# Altium PCB PCB.PcbDoc
Units mm, origin at the board's own origin, x right, y up, seen from the top; angles counter-clockwise.
Board outline 74.04 x 66.93 mm, 2 copper layers (Top Layer, Bottom Layer); 25 components, 24 nets, 134 pads, 4 vias.
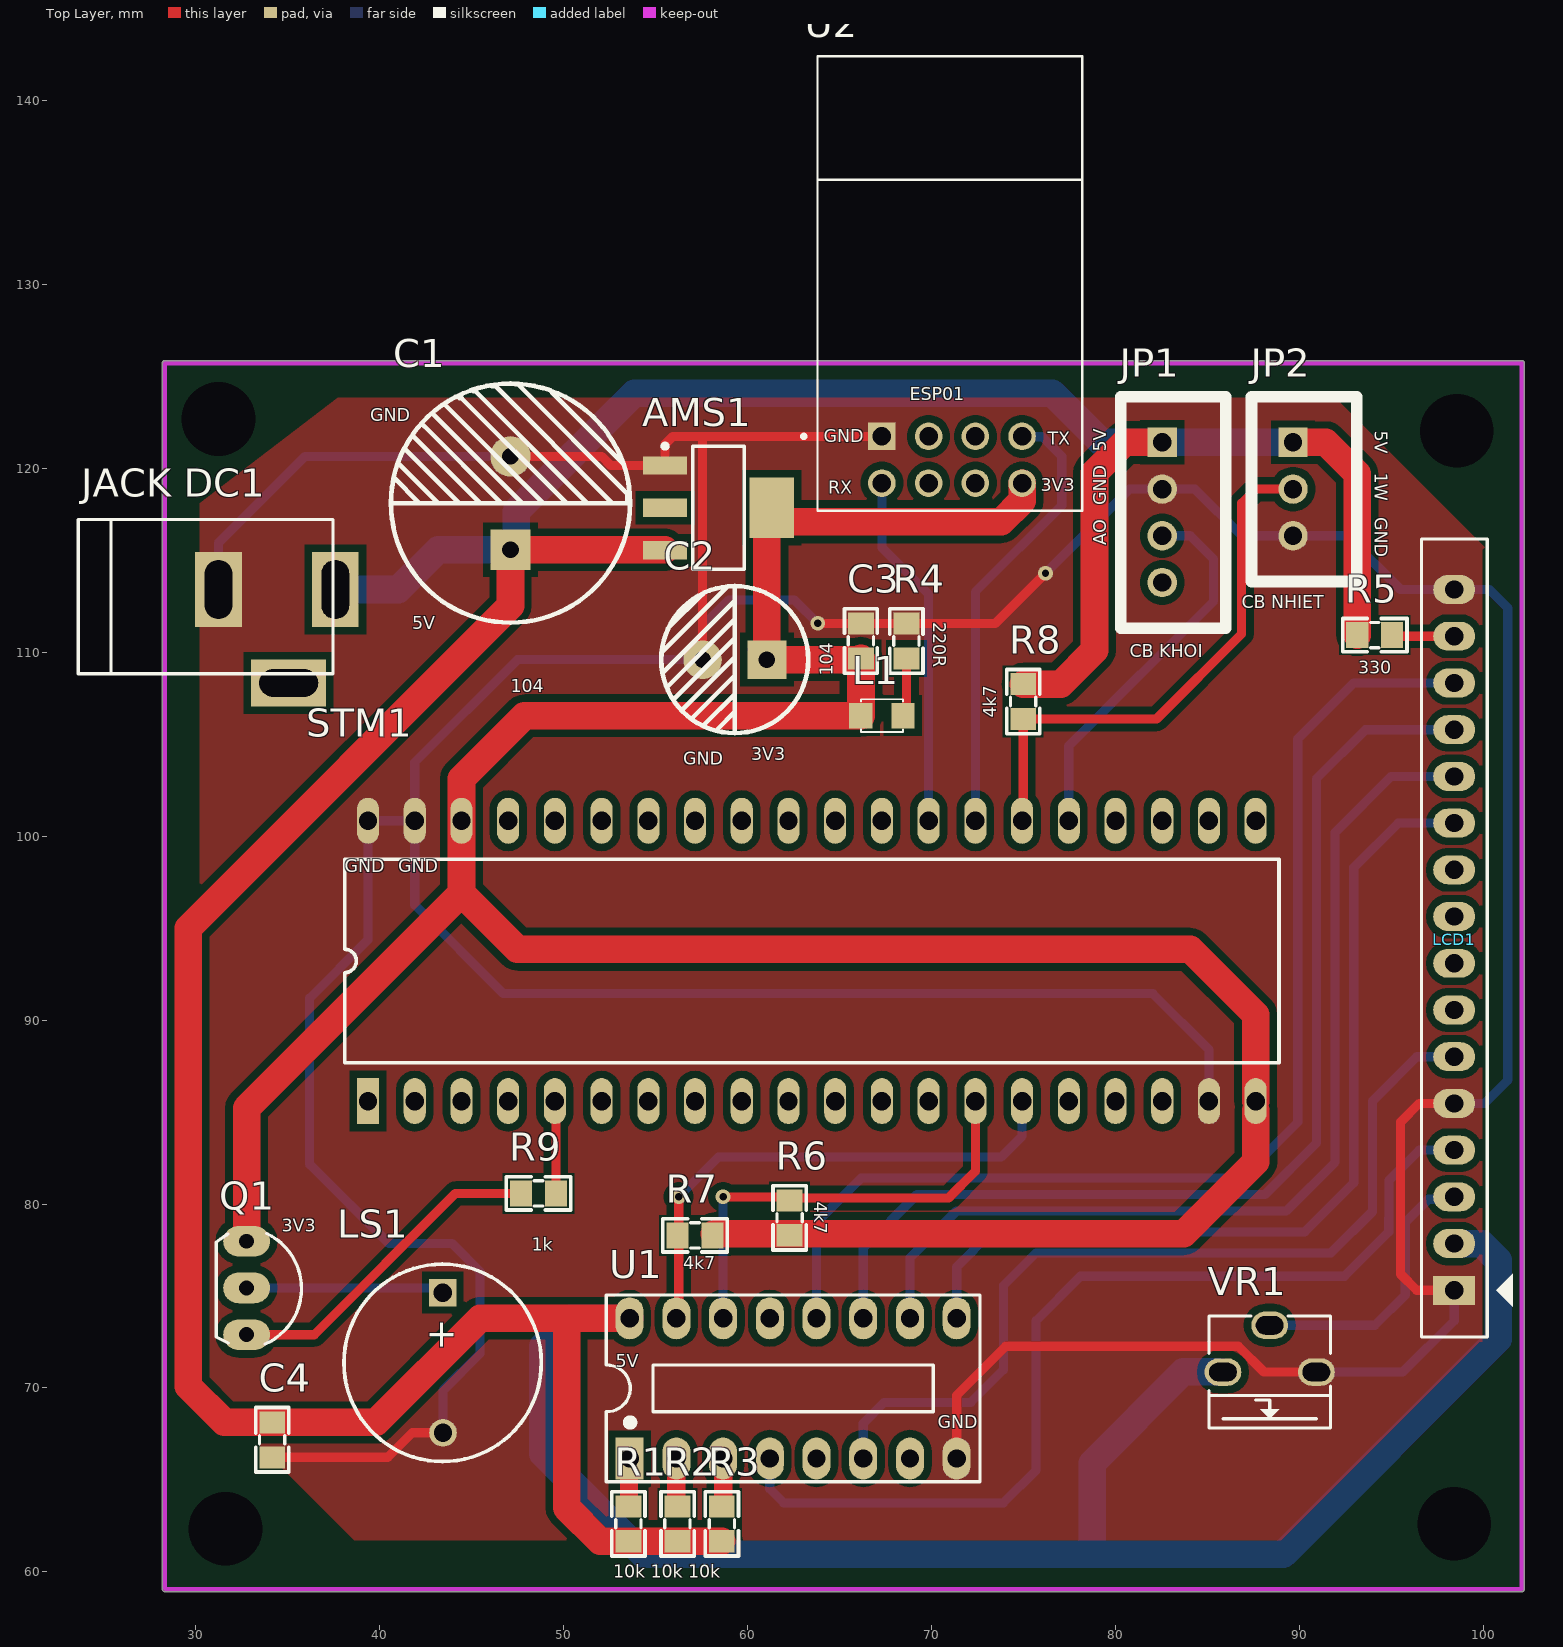
[diagram p0: Top Layer view]
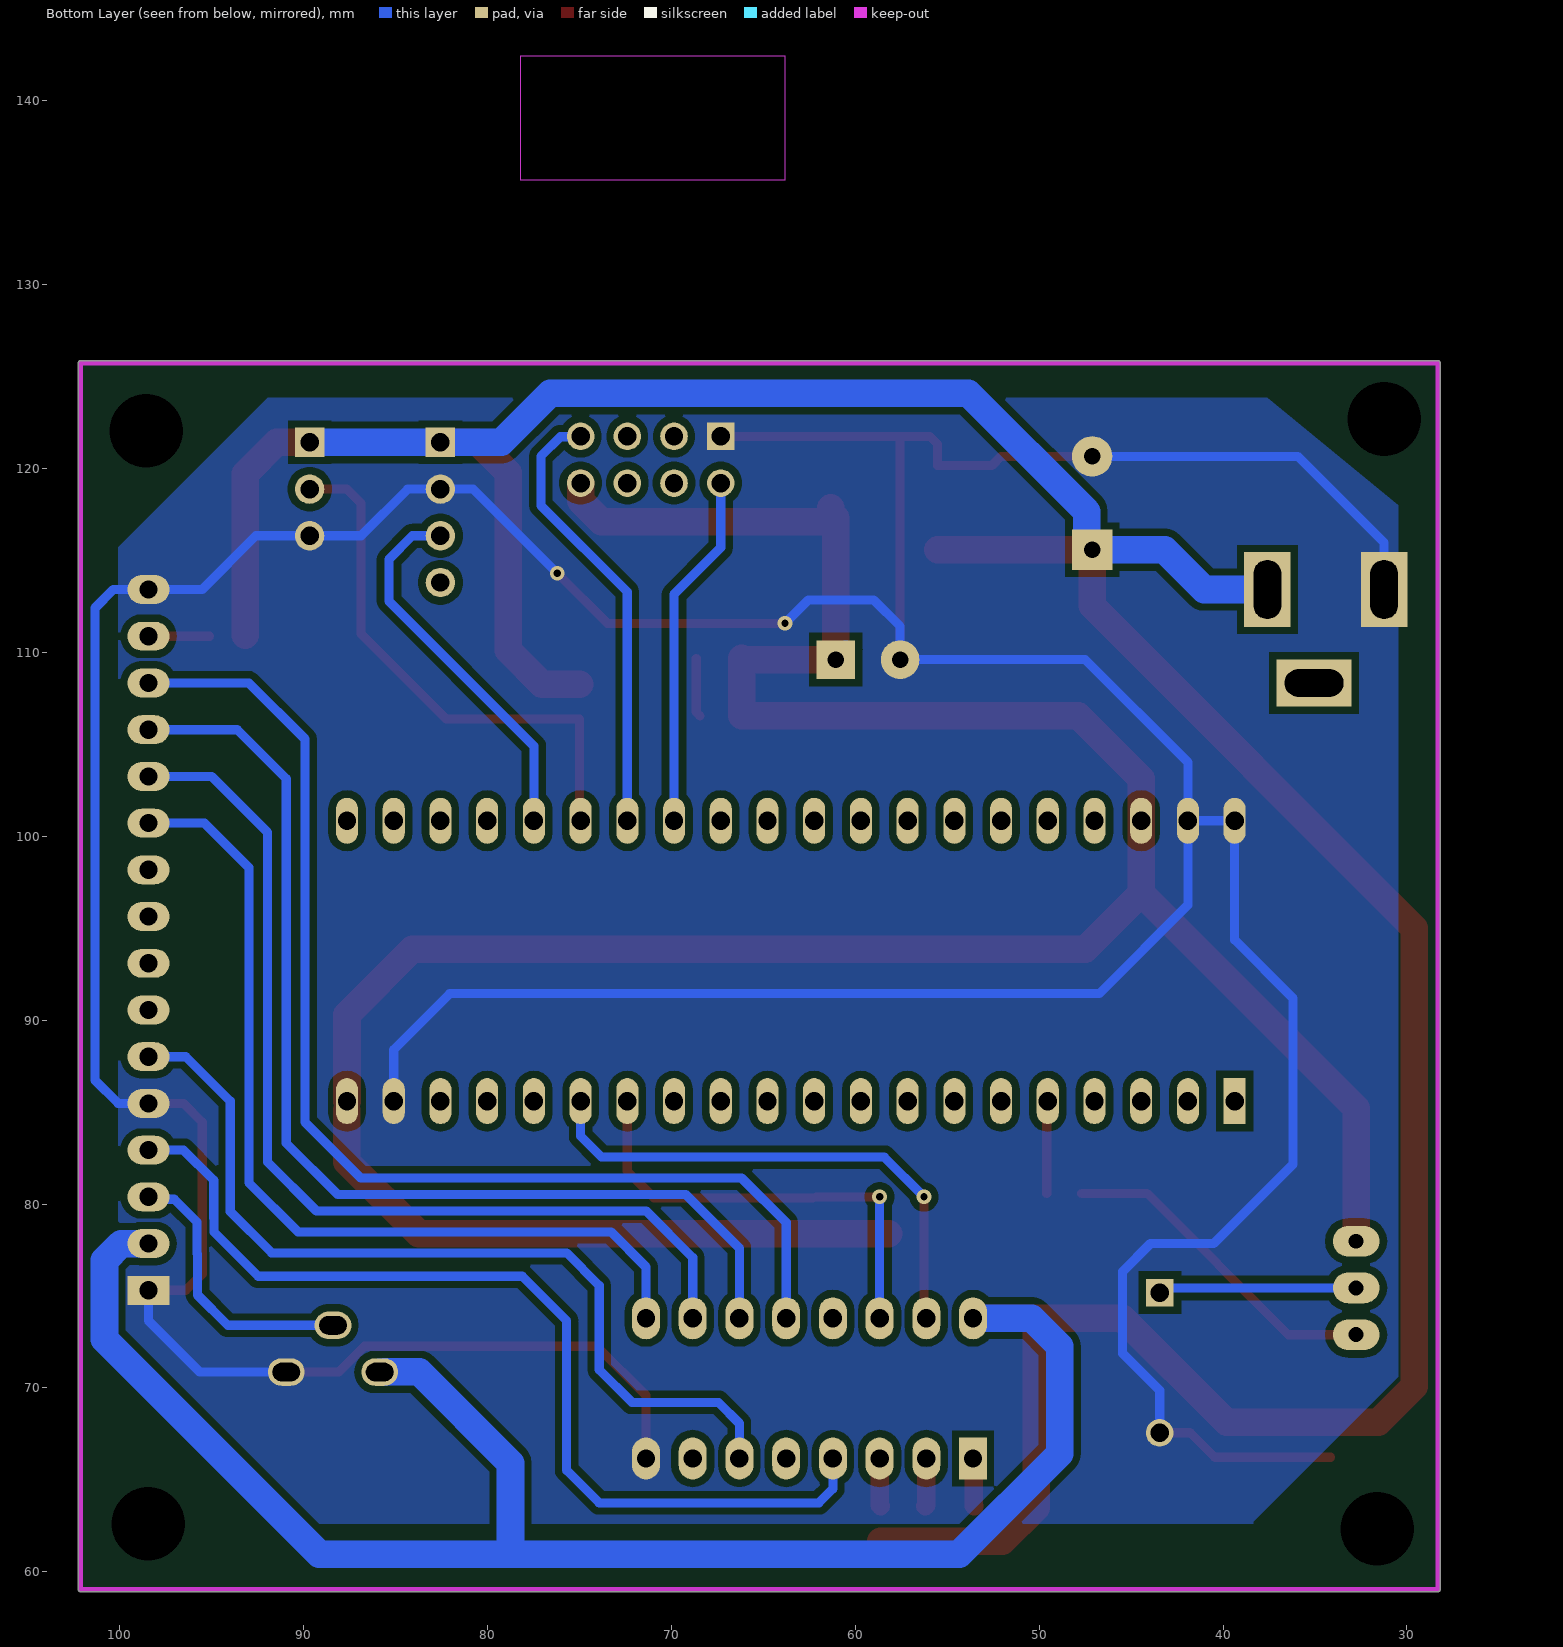
[diagram p1: Bottom Layer view, seen from below]

## Layer stack, top to bottom
Top Solder: solder mask 0.0102, Solder Resist, Dk 3.5
Top Layer: signal copper 0.0356
Dielectric 1: dielectric 0.32, FR-4, Dk 4.8
Bottom Layer: signal copper 0.0356
Bottom Solder: solder mask 0.0102, Solder Resist, Dk 3.5

## Board outline
28.321,58.928 cw(c28.321,59.055) 28.194,59.055 28.194,125.73 cw(c28.321,125.73) 28.321,125.857 102.108,125.857 cw(c102.108,125.73) 102.235,125.73 102.235,59.055 cw(c102.108,59.055) 102.108,58.928

## Design rules (kind name [scope] priority, off if disabled: settings)
Clearance Clearance_1 [InNamedPolygon('NONET_L01_P000')] p1: gap=0.4 ignorepadtopadclearanceinfootprint=FALSE
Clearance [All] p2: gap=0.4 ignorepadtopadclearanceinfootprint=FALSE
PlaneConnect [All] p1: planeconnectstyle=Direct reliefexpansion=0.508 reliefentries=4 reliefconductorwidth=0.254 reliefairgap=0.254
PolygonConnect [All] p1: connectstyle=Direct reliefconductorwidth=0.254 reliefentries=4 polygonreliefangle="90 Angle" airgapwidth=0.254
RoutingVias [All] p1: holewidth=0.4 width=0.8 viastyle="Through Hole" minholewidth=0.4 minwidth=0.8 maxholewidth=0.4 maxwidth=0.8
SolderMaskExpansion [All] p1: expansion=0.102 istentingtop=FALSE
Width [All] p1: maxlimit=1.5 minlimit=0.5 preferedwidth=1
29 further rules are at their usual default settings.

## Components (designator, comment, footprint, x,y, rotation, side; value= is the part's Value field where it differs from the comment)
AMS1 "AMS1117-3.3V" SOT223 58.42,117.856 r270 top value="AMS1117-3.3V SOT223"
C1 "680uF" "tu hoa 13mm" 47.117,118.11 r90 top
C2 "470uF" "tu hoa 8mm" 59.309,109.601 r180 top
C3 "104" "tu 0805" 66.167,110.617 r90 top
C4 "104" "tu 0805" 34.163,67.183 r270 top
"JACK DC1" "JACK DC 5.5" "JACK DC 5.5" 34.417,110.871 r0 top value="Jac DC"
JP1 "Header 4P 2.54 Duc Thang" XH2.54M-4 82.55,121.412 r270 top
JP2 "Header 3P 2.54 Duc Thang" XH2.54M-3 89.662,121.412 r270 top
L1 "LED 0805" LED-0805-Red 66.167,106.553 r0 top
LCD1 "LCD1602 XL" "LCD1602 with Jump" 98.425,75.311 r90 top
LS1 "Coi Chip Speaker" "Coi Chip Speacker" 43.434,75.184 r270 top
Q1 "A1015" QTO-92 32.766,75.438 r270 top
R1 "10k" "tro smd 0805" 53.467,62.611 r90 top
R2 "10k" "tro smd 0805" 56.134,62.611 r90 top
R3 "10k" "tro smd 0805" 58.547,62.611 r90 top
R4 "220R" "tro smd 0805" 68.707,110.617 r270 top
R5 "330R" "Tro SMD 0805" 94.107,110.871 r180 top
R6 "4.7k" "tro smd 0805" 62.23,79.248 r90 top
R7 "4.7k" "tro smd 0805" 57.15,78.232 r180 top
R8 "4.7k" "tro smd 0805" 74.93,107.315 r90 top
R9 "1k" "tro smd 0805" 48.641,80.518 r180 top
STM1 "KIT STM32F103C8T6" "STM32F103 KIT" 39.37,85.598 r90 top
U1 "PCF8574" DIP16 53.594,66.167 r0 top
U2 "ESP8266-01/ESP-01" XCVR_ESP8266-01/ESP-01 71.12,130.048 r0 top
VR1 "10K" "Bien Tro Tam Giac Nam" 85.852,70.866 r270 top

## Footprints (in the part's own frame and the unit in brackets; to place one, negate y for a bottom-side part, rotate by r counter-clockwise, add the part's x,y. Pads: shape width x height; smd on the part's side, far side on the other; paste and mask are expansions set on the pad)
"Bien Tro Tam Giac Nam" [mm] "RM063"
  oval 1.5x2 hole 1 slot 1.5 at 90 deg: F(-2.54,2.54) F(0,5.08) F(0,0)
  silkscreen extent -3.05,-0.76 3.05,5.84, body extent -2.68,-0.71 2.95,5.79, height 9.5
"Coi Chip Speacker" [mm]
  rect 1.5x1.5 hole 1: F(0,0)
  round 1.5 hole 1: F(7.62,0.013)
  silkscreen extent -1.55,-5.38 9.18,5.36, body extent -2.22,-6 13.24,6, height 4.5
DIP16 [mil] "16 PIN, W 300mil, Pin to pin 100mil"
  rect 60x90 hole 39.37: F(0,0)
  oval 60x90 hole 39.37: F(0,300) F(100,0) F(100,300) F(200,0) F(200,300) F(300,0) F(300,300) F(400,0) F(400,300) F(500,0) F(500,300) F(600,0) F(600,300) F(700,0) F(700,300)
  silkscreen extent -50,-50 750,350, body extent -52,-57 752,356, height 299
"JACK DC 5.5" [mm] "Jac DC input"
  rect 2.54x4.064 hole 1.5 slot 3.2 at 90 deg: F(-3.175,2.54) F(3.175,2.54)
  rect 4.064x2.54 hole 1.5 slot 3.2 at 0 deg: F(0.635,-2.54)
  silkscreen extent -10.79,-2.03 3.05,6.35, body extent -10.42,-2.67 3.4,6.84, height 11.02
"LCD1602 with Jump" [mil] "LCD dipslay 16x2, 16 pin"
  rect 62x90 hole 39: F(0,0)
  oval 62x90 hole 39: F(100,0) F(200,0) F(300,0) F(400,0) F(500,0) F(600,0) F(700,0) F(800,0) F(900,0) F(1000,0) F(1100,0) F(1200,0) F(1300,0) F(1400,0) F(1500,0)
  silkscreen extent -100,-125 1608,70, body extent -320,-1353 2850,84, height 764
LED-0805-Red [mil]
  rect 50x55 smd: F(0,0) F(90,0)
  silkscreen extent 0,-35 90,35, body extent 5,-25 85,25, height 43
QTO-92 [mil] "TO-92"
  oval 66x100 hole 32: F(-100,0) F(0,0) F(100,0)
  silkscreen extent -117,-65 120,118, body extent -109,-66 109,95, height 245
SOT223 [mm]
  rect 1x2.4 smd: F(-2.3,-2.9) F(0,-2.9) F(2.3,-2.9)
  rect 3.3x2.4 smd: F(0,2.9)
  silkscreen extent -3.47,-3.02 3.35,1.4, body extent -3.25,-3.56 3.25,3.4, height 1.68
"STM32F103 KIT" [mm]
  rect 2.5x1.2 hole 1: F(0,0)
  oval 2.5x1.2 hole 1: F(0,-2.54) F(0,-5.08) F(0,-7.62) F(0,-10.16) F(0,-12.7) F(0,-15.24) F(0,-17.78) F(0,-20.32) F(0,-22.86) F(0,-25.4) F(0,-27.94) F(0,-30.48) F(0,-33.02) F(0,-35.56) F(0,-38.1) F(0,-40.64) F(0,-43.18) F(0,-45.72) F(0,-48.26) F(15.24,-22.86) F(15.24,-20.32) F(15.24,-17.78) F(15.24,-15.24) F(15.24,-12.7) F(15.24,-10.16) F(15.24,-7.62) F(15.24,-5.08) F(15.24,-2.54) F(15.24,0) F(15.24,-48.26) F(15.24,-45.72) F(15.24,-43.18) F(15.24,-40.64) F(15.24,-38.1) F(15.24,-35.56) F(15.24,-33.02) F(15.24,-30.48) F(15.24,-27.94) F(15.24,-25.4)
  silkscreen extent 2.08,-49.53 13.16,1.27, body extent -3.81,-53.97 19.05,3.59, height 16.12
"tro smd 0805" [mm]
  rect 1.2x1.4 smd: F(-0.946,-0.061) F(0.954,-0.061)
  silkscreen extent -1.75,-0.97 1.75,0.84, body extent -1.56,-0.76 1.44,0.64, height 0.53
"Tro SMD 0805" [mm]
  rect 1.2x1.4 smd: F(-0.946,-0.061) F(0.954,-0.061)
  silkscreen extent -1.75,-0.97 1.75,0.84, body extent -1.56,-0.76 1.44,0.64, height 0.53
"tu 0805" [mm] "Compoment SMD 80x50mil"
  rect 1.2x1.4 smd: F(-0.946,-0.003) F(0.954,-0.003)
  silkscreen extent -1.75,-0.89 1.75,0.89, body extent -1.01,-0.64 1.01,0.63, height 0.61
"tu hoa 8mm" [mm]
  rect 2.1x2.1 hole 0.9: F(-1.75,0)
  round 2.1 hole 0.9: F(1.75,0)
  silkscreen extent -4,-4 4,4, body extent -4.1,-4.07 4.1,4.13, height 13.81
"tu hoa 13mm" [mm]
  rect 2.2x2.2 hole 0.9: F(-2.54,0)
  round 2.2 hole 0.9: F(2.54,0)
  silkscreen extent -6.5,-6.5 6.5,6.5, body extent -6.25,-6.25 6.26,6.25, height 23.02
XCVR_ESP8266-01/ESP-01 [mm]
  round 1.5 hole 1: F(-3.81,-10.85) F(-1.27,-10.85) F(-1.27,-8.31) F(1.27,-10.85) F(1.27,-8.31) F(3.81,-10.85) F(3.81,-8.31)
  rect 1.5x1.5 hole 1: F(-3.81,-8.31)
  Keep-Out Layer region: 7.09,5.65 -7.31,5.65 -7.31,12.35 7.09,12.35
  silkscreen extent -8.16,-12.35 7.09,12.35
XH2.54M-3 [mm]
  rect 1.6x1.6 hole 1: F(0,0)
  round 1.6 hole 1: F(2.54,0) F(5.08,0)
  silkscreen extent -2.48,-2.26 7.56,3.46, body extent -2.48,-2.26 7.56,3.48, height 6.91
XH2.54M-4 [mm]
  rect 1.6x1.6 hole 1: F(0,0)
  round 1.6 hole 1: F(2.54,0) F(5.08,0) F(7.62,0)
  silkscreen extent -2.48,-2.26 10.1,3.46, body extent -2.48,-2.26 10.1,3.48, height 6.91

## Part data
AMS1: library part "AMS1117 SMD", "Dán", Chung_Loai=Dán, Don_Vi=Con, Ma_Hang=MH000596
C1: library part "Tu Hoa 680uF 25V 13x17", "Cắm", Chung_Loai=Cắm, Don_Vi=Con, Ma_Hang=MH005082, So_Chan=2, Ten_Linh_Kien="Tụ Hóa 680uF 25V"
C2: library part "Tu Hoa 470uF 6.3V 8x11", "Cắm", Chung_Loai=Cắm, Don_Vi=Con, Ma_Hang=MH004511, So_Chan=2, Ten_Linh_Kien="Tụ Hóa 470uF 6.3V 8x11MM"
C3 C4: library part "Tu 0805 104 50V 10%", "Dán", Chung_Loai=Dán, Don_Vi=Con, Ma_Hang=MH004551, So_Chan=2, Ten_Linh_Kien="Tụ 0805 104-100nF 10% 50V"
JP1 JP2: "Cắm", Chung_Loai=Cắm, Don_Vi=Con
  JP1: Ma_Hang=MH001285, Ten_Linh_Kien="Header 4P XH2.54-4P Đực Thẳng"
  JP2: Ma_Hang=MH001292, Ten_Linh_Kien="Header 3P XH2.54-3P Đực Thẳng"
L1: library part "LED 0805 Do", "Dán", Chung_Loai=Dán, Don_Vi=Con, Ma_Hang=MH000897, Ten_Linh_Kien="LED 0805 Màu Đỏ (Red)"
LCD1: "LCD 1602 Xanh Lá", CHIP=HD44780, Ma_Hang=67HZ, NCC=NSHOP, Ten="Màn hình LCD 1602 Xanh Lá"
LS1: "Còi chip"
Q1: "PNP 600mW, ECB"
R1 R2 R3: library part "Tro 0805 5% 10k", "Dán", Chung_Loai=Dán, Don_Vi=Con, Ma_Hang=MH005239, So_Chan=2, Ten_Linh_Kien="Trở 0805 5% 10k"
R4: library part "Tro 0805 5% 220R", "Dán", Chung_Loai=Dán, Don_Vi=Con, Ma_Hang=MH005259, So_Chan=2, Ten_Linh_Kien="Trở 0805 5% 220R"
R5: library part "Tro 0805 5% 330R", "Dán", Chung_Loai=Dán, Don_Vi=Con, Ma_Hang=MH005337, So_Chan=2, Ten_Linh_Kien="Trở 0805 5% 330R"
R6 R7 R8: library part "Tro 0805 5% 4.7k", "Dán", Chung_Loai=Dán, Don_Vi=Con, Ma_Hang=MH005307, So_Chan=2, Ten_Linh_Kien="Trở 0805 5% 4.7k"
R9: library part "Tro 0805 5% 1k", "Dán", Chung_Loai=Dán, Don_Vi=Con, Ma_Hang=MH005234, So_Chan=2, Ten_Linh_Kien="Trở 0805 5% 1k"
STM1: library part "STM32f103 Bluepill", "KIT STM32F103C8T6 Bluepill"
U1: "I2C PORT EXPANDER", Frequency - Clock=100KHz, Manufacturer="NXP Semiconductors", Manufacturer Part Number=PCF8574T/3,512, Operating Temperature="-40°C ~ 85°C", Package / Case="16-SOIC (7.5mm Width)", Supplier Part Number=568-1076-5-ND, Voltage - Supply="2.5 V ~ 6 V", Category="Integrated Circuits (ICs)", Includes=POR, Interface=I²C, Interrupt Output=Yes, Number of I /O=8, Packaging=Tube, RoHS="RoHS Compliant", Supplier=Digi-Key, Supplier 1=Digi-Key, Supplier Part Number 1=568-1076-5-ND
U2: "MakerFocus 4pcs ESP8266 ESP-01 Serial Wireless WiFi Transceiver Receiver Module 1MB SPI Flash DC3.0-3.6V Internet of Things WiFi Module Board Compatible with Ar duino", Package=None, Availability=Unavailable, MP=ESP8266-01/ESP-01, Price=None
VR1: library part "Bien tro tam giac 10K Nam", "Cắm", Chung_Loai=Cắm, Don_Vi=Con, Ma_Hang=MH004025, Ten_Linh_Kien="Biến Trở Tam Giác 103-10K RM063 (Chân nằm)"

## Free pads (board coordinates)
  round 1.524 hole 4: F(31.242,122.682) F(31.623,62.357) F(98.425,62.611) F(98.552,122.047)

## Via types
v1: diameter 0.8, hole 0.4, Top Layer to Bottom Layer, 4 vias

## Nets (pads, with @x,y where several pads share a name; then routed paths per layer and width w, separated by ;. In a path a pad name is that pad's centre, name@x,y a point inside that pad or via, vN(x,y) a via of type N, cw(c..) or ccw(c..) an arc to the next point about the centre after c; other vN are vias at no path point)
1W: JP2.F@89.662,118.872 R8.F@74.991,106.369 STM1.F@74.93,100.838 | length 29.5
  Top Layer w0.5: STM1.F@74.991,100.899 74.991,106.369 82.239,106.369 86.868,110.998 86.868,118.11 87.63,118.872 JP2.F@89.662,118.872
3V3: AMS1.F@61.32,117.856 C2.F@61.059,109.601 C3.F@66.17,109.671 L1.F@66.167,106.553 Q1.F@32.766,77.978 R6.F@62.291,78.302 R7.F@58.096,78.293 STM1.F@44.45,100.838 STM1.F@87.63,85.598 U2.F@74.93,119.198 | length 169.8
  Top Layer w1.5: Q1.F@32.766,77.978 32.766,85.217 44.45,96.901 ; R7.F@58.185,78.382 83.718,78.382 87.644,82.308 STM1.F@87.644,85.098 ; AMS1.F@61.059,117.298 61.059,109.601 C3.F@66.1,109.601 ; AMS1.F@61.32,117.856 61.32,117.544 61.77,117.094 73.797,117.094 74.93,118.227 U2.F@74.93,119.198 ; L1.F@66.167,106.553 47.879,106.553 44.45,103.124 44.45,100.838 44.45,96.901 ; L1.F@66.17,106.556 C3.F@66.17,109.671 ; STM1.F@87.63,85.598 87.63,90.297 84.074,93.853 47.498,93.853 44.45,96.901
  Bottom Layer w1: C2.F@60.509,110.151 C2.F@61.059,109.601
5V: "JACK DC1.F"@37.592,113.411 AMS1.F@55.52,115.556 C1.F@47.117,115.57 C4.F@34.16,68.129 JP1.F@82.55,121.412 JP2.F@89.662,121.412 LCD1.F@98.425,77.851 R1.F@53.528,61.665 R2.F@56.195,61.665 R3.F@58.608,61.665 R5.F@93.153,110.932 R8.F@74.991,108.269 U1.F@53.594,73.787 VR1.F@85.852,70.866 | length 289
  Top Layer w1.5: U1.F@53.594,73.787 50.165,73.787 ; AMS1.F@55.506,115.57 47.117,115.57 47.117,112.522 29.598,95.003 29.598,70.097 31.566,68.129 34.16,68.129 39.808,68.129 45.466,73.787 50.165,73.787 ; R3.F@58.608,61.665 56.195,61.665 53.528,61.665 52,61.665 50.165,63.5 50.165,73.787 ; R8.F@74.991,108.269 77.027,108.269 78.867,110.109 78.867,119.761 80.518,121.412 JP1.F@82.55,121.412 ; JP2.F@89.662,121.412 89.664,121.41 91.442,121.41 93.153,119.699 R5.F@93.153,110.932
  Bottom Layer w1.5: 37.592,113.411 41.021,113.411 43.18,115.57 C1.F@47.117,115.57 ; C1.F@47.419,115.872 47.419,117.65 53.848,124.079 76.581,124.079 79.248,121.412 82.55,121.412 JP2.F@89.662,121.412 ; U1.F@53.585,73.796 50.405,73.796 48.881,72.272 48.881,66.43 54.341,60.97 78.74,60.97 ; VR1.F@85.843,70.866 85.602,70.866 85.593,70.875 83.702,70.875 78.74,65.913 78.74,60.97 ; LCD1.F@98.425,77.845 98.434,77.837 99.915,77.837 100.817,76.935 100.817,72.646 89.141,60.97 78.74,60.97
A: LCD1.F@98.425,110.871 R5.F@95.053,110.932 | length 3.3
  Top Layer w0.5: R5.F@95.113,110.871 LCD1.F@98.425,110.871
AO: JP1.F@82.55,116.332 STM1.F@77.47,100.838 | length 20.8
  Bottom Layer w0.5: STM1.F@77.47,100.838 77.47,104.902 85.344,112.776 85.344,115.062 84.074,116.332 JP1.F@82.55,116.332
D4: LCD1.F@98.425,100.711 U1.F@71.374,73.787 | length 49.9
  Bottom Layer w0.5: U1.F@71.374,73.787 71.374,76.581 73.279,78.486 73.787,78.486 90.297,78.486 92.964,81.153 92.964,98.298 95.377,100.711 LCD1.F@98.425,100.711
D5: LCD1.F@98.425,103.251 U1.F@68.834,73.787 | length 54.2
  Bottom Layer w0.5: U1.F@68.834,73.787 68.834,77.089 71.363,79.618 89.154,79.618 89.286,79.618 91.948,82.28 91.948,100.203 94.996,103.251 LCD1.F@98.425,103.251
D6: LCD1.F@98.425,105.791 U1.F@66.294,73.787 | length 59.2
  Bottom Layer w0.5: U1.F@66.294,73.787 66.294,77.597 69.215,80.518 88.138,80.518 90.932,83.312 90.932,103.124 93.599,105.791 LCD1.F@98.425,105.791
D7: LCD1.F@98.425,108.331 U1.F@63.754,73.787 | length 64.2
  Bottom Layer w0.5: U1.F@63.754,73.787 63.754,78.994 66.178,81.418 86.879,81.418 89.916,84.455 89.916,105.283 92.964,108.331 LCD1.F@98.425,108.331
E: LCD1.F@98.425,88.011 U1.F@66.294,66.167 | length 48.5
  Bottom Layer w0.5: U1.F@66.294,66.167 66.294,68.072 67.437,69.215 72.136,69.215 73.914,70.993 73.914,75.565 75.692,77.343 91.727,77.343 93.98,79.596 93.98,85.598 96.393,88.011 LCD1.F@98.425,88.011
GND: "JACK DC1.F"@31.242,113.411 AMS1.F@55.52,120.156 C1.F@47.117,120.65 C2.F@57.559,109.601 C3.F@66.17,111.571 C4.F@34.16,66.229 JP1.F@82.55,118.872 JP2.F@89.662,116.332 LCD1.F@98.425,75.311 LCD1.F@98.425,85.471 LCD1.F@98.425,113.411 LS1.F@43.447,67.564 R4.F@68.646,111.563 STM1.F@39.37,100.838 STM1.F@41.91,100.838 STM1.F@85.09,85.598 U1.F@71.374,66.167 U2.F@67.31,121.738 VR1.F@90.932,70.866 | length 314.5
  Top Layer w0.5: C4.F@34.16,66.229 40.448,66.229 41.783,67.564 LS1.F@43.447,67.564 ; C1.F@47.117,120.65 52.07,120.65 52.564,120.156 55.52,120.156 55.52,121.306 55.952,121.738 U2.F@67.31,121.738 ; C2.F@57.559,109.601 57.559,121.71 ; v1(63.819,111.571) C3.F@66.17,111.571 ; C3.F@66.179,111.563 73.463,111.563 v1(76.2,114.3) ; U1.F@71.374,66.167 71.374,69.596 74.044,72.266 86.682,72.266 88.082,70.866 VR1.F@90.932,70.866 ; LCD1.F@98.425,75.311 96.393,75.311 95.504,76.2 95.504,84.455 96.52,85.471 LCD1.F@98.425,85.471
  Bottom Layer w0.5: 31.242,113.411 31.242,115.951 35.941,120.65 47.117,120.65 C1.F@46.863,120.396 ; LS1.F@43.447,67.564 43.447,69.863 45.466,71.882 45.466,76.327 43.942,77.851 40.513,77.851 36.195,82.169 36.195,91.186 39.37,94.361 39.37,100.838 STM1.F@41.91,100.838 ; v1(63.819,111.571) 62.546,112.845 58.997,112.845 57.559,111.407 57.559,109.601 47.498,109.601 41.91,104.013 STM1.F@41.91,100.838 ; v1(76.2,114.3) 80.772,118.872 82.55,118.872 84.328,118.872 86.868,116.332 89.662,116.332 92.583,116.332 95.504,113.411 98.425,113.411 100.33,113.411 101.331,112.41 101.331,86.726 100.076,85.471 LCD1.F@98.425,85.471 ; STM1.F@85.09,85.598 85.09,88.392 82.042,91.44 46.736,91.44 41.91,96.266 STM1.F@41.91,100.838 ; VR1.F@90.932,70.866 95.631,70.866 98.425,73.66 LCD1.F@98.425,75.311
NetL1_2: L1.F@68.453,106.553 R4.F@68.646,109.663 | length 3.2
  Top Layer w0.5: L1.F@68.453,106.553 68.646,106.746 R4.F@68.646,109.663
NetLS1_1: LS1.F@43.434,75.184 Q1.F@32.766,75.438 | length 10.4
  Bottom Layer w0.5: Q1.F@32.766,75.438 LS1.F@43.18,75.438
NetQ1_3: Q1.F@32.766,72.898 R9.F@47.687,80.579 | length 18.1
  Top Layer w0.5: Q1.F@32.766,72.898 36.449,72.898 44.13,80.579 R9.F@47.687,80.579
NetR1_2: R1.F@53.528,63.565 U1.F@53.594,66.167 | length 2.6
  Top Layer w1: R1.F@53.528,63.565 53.561,63.598 53.561,66.134 U1.F@53.594,66.167
NetR2_2: R2.F@56.195,63.565 U1.F@56.134,66.167 | length 2.6
  Top Layer w1: U1.F@56.134,66.167 56.134,63.626 R2.F@56.195,63.565
NetR3_2: R3.F@58.608,63.565 U1.F@58.674,66.167 | length 2.6
  Top Layer w1: R3.F@58.608,63.565 58.674,63.632 U1.F@58.674,66.167
RS: LCD1.F@98.425,82.931 U1.F@61.214,66.167 | length 53.4
  Bottom Layer w0.5: U1.F@61.214,66.167 61.214,64.516 61.976,63.754 73.914,63.754 75.692,65.532 75.692,73.533 ; 75.692,73.66 78.105,76.073 92.456,76.073 94.869,78.486 94.869,79.212 94.88,79.223 94.88,81.291 96.52,82.931 LCD1.F@98.425,82.931
RX: STM1.F@69.85,100.838 U2.F@67.31,119.198 | length 19.4
  Bottom Layer w0.5: U2.F@67.31,119.198 67.31,115.697 69.85,113.157 STM1.F@69.85,100.838
SCL: R6.F@62.291,80.202 STM1.F@72.39,85.598 U1.F@58.674,73.787 | length 24.8
  Top Layer w0.5: v1(58.674,80.391) R6.F@62.102,80.391 ; R6.F@62.291,80.329 70.931,80.329 72.39,81.788 STM1.F@72.39,85.598
  Top Layer w1: U1.F@58.674,73.787 U1.F@58.674,74.026
  Bottom Layer w0.5: U1.F@58.674,73.787 v1(58.674,80.391)
SDA: R7.F@56.196,78.293 STM1.F@74.93,85.598 U1.F@56.134,73.787 | length 28.4
  Top Layer w0.5: U1.F@56.261,73.914 v1(56.261,80.391)
  Bottom Layer w0.5: v1(56.261,80.391) 58.42,82.55 73.787,82.55 74.93,83.693 STM1.F@74.93,85.598
TIM: R9.F@49.587,80.579 STM1.F@49.53,85.598 | length 5
  Top Layer w0.5: R9.F@49.587,80.579 STM1.F@49.587,85.541
TX: STM1.F@72.39,100.838 U2.F@74.93,121.738 | length 24.4
  Bottom Layer w0.5: STM1.F@72.39,100.838 72.39,113.284 77.089,117.983 77.089,120.65 76.026,121.713 74.955,121.713 U2.F@74.93,121.738
VO: LCD1.F@98.425,80.391 VR1.F@88.392,73.406 | length 15.2
  Bottom Layer w0.5: VR1.F@88.392,73.406 94.107,73.406 95.758,75.057 95.758,77.285 95.78,77.307 95.78,79.016 97.025,80.261 98.295,80.261 LCD1.F@98.425,80.391
pads on no net: "JACK DC1.F"@35.052,108.331 AMS1.F@55.52,117.856 JP1.F@82.55,113.792 LCD1.F@98.425,90.551 LCD1.F@98.425,93.091 LCD1.F@98.425,95.631 LCD1.F@98.425,98.171 STM1.F@39.37,85.598 STM1.F@41.91,85.598 STM1.F@44.45,85.598 STM1.F@46.99,85.598 STM1.F@46.99,100.838 STM1.F@49.53,100.838 STM1.F@52.07,85.598 STM1.F@52.07,100.838 STM1.F@54.61,85.598 STM1.F@54.61,100.838 STM1.F@57.15,85.598 STM1.F@57.15,100.838 STM1.F@59.69,85.598 STM1.F@59.69,100.838 STM1.F@62.23,85.598 STM1.F@62.23,100.838 STM1.F@64.77,85.598 STM1.F@64.77,100.838 STM1.F@67.31,85.598 STM1.F@67.31,100.838 STM1.F@69.85,85.598 STM1.F@77.47,85.598 STM1.F@80.01,85.598 STM1.F@80.01,100.838 STM1.F@82.55,85.598 STM1.F@82.55,100.838 STM1.F@85.09,100.838 STM1.F@87.63,100.838 U1.F@61.214,73.787 U1.F@63.754,66.167 U1.F@68.834,66.167 U2.F@69.85,119.198 U2.F@69.85,121.738 U2.F@72.39,119.198 U2.F@72.39,121.738

## Polygon pours and split planes (outlines as drawn)
GND on Bottom Layer "GND_L02_P000" (solid, remove dead copper, pour order 0): 37.592,123.825 38.1,123.825 91.948,123.825 100.076,115.697 100.076,70.739 91.948,62.611 38.354,62.611 38.354,62.738 30.48,70.612 30.48,117.983
GND on Top Layer "GND_L01_P001" (solid, remove dead copper, pour order 1): 37.719,123.825 91.948,123.825 100.076,115.697 99.949,115.57 99.949,72.517 99.822,72.517 89.027,61.722 38.608,61.722 29.972,70.358 30.226,70.612 30.226,118.11

## Keep-outs
Keep-Out Layer:
  lines w0.254: 28.321,59.055 28.321,125.73 102.108,125.73 102.108,59.055 28.321,59.055

## Silkscreen, mask and mechanical layers (free items; w line width, h text height)
Top Overlay:
  text "ESP01" at 68.834,123.698 h0.7
  text "GND" at 39.497,122.555 h0.7
  text "5V" at 94.107,122.047 h0.7 r270
  text "GND" at 64.135,121.412 h0.7
  text "TX" at 76.327,121.285 h0.7
  text "5V" at 79.502,120.904 h0.7 r90
  text "1W" at 94.107,119.761 h0.7 r270
  text "3V3" at 75.946,118.745 h0.7
  text "RX" at 64.389,118.618 h0.7
  text "GND" at 79.502,117.983 h0.7 r90
  text "GND" at 94.107,117.348 h0.7 r270
  text "AO" at 79.502,115.824 h0.7 r90
  text "CB NHIET" at 86.868,112.395 h0.7
  text "220R" at 70.104,111.633 h0.7 r270
  text "5V" at 41.783,111.252 h0.7
  text "CB KHOI" at 80.772,109.728 h0.7
  text "330" at 93.218,108.839 h0.7
  text "104" at 64.643,108.712 h0.7 r90
  text "104" at 47.117,107.823 h0.7
  text "4k7" at 73.533,106.426 h0.7 r90
  text "3V3" at 60.198,104.14 h0.7
  text "GND" at 56.515,103.886 h0.7
  text "GND" at 38.1,98.044 h0.7
  text "GND" at 41.021,98.044 h0.7
  text "4k7" at 63.627,80.137 h0.7 r270
  text "3V3" at 34.671,78.486 h0.7
  text "1k" at 48.26,77.47 h0.7
  text "4k7" at 56.515,76.454 h0.7
  text "5V" at 52.832,71.12 h0.7
  text "GND" at 70.358,67.818 h0.7
  text "10k 10k 10k" at 52.705,59.69 h0.7

## Text inside footprints (layer, text, board x,y; h text height)
LS1: Top Overlay "+" at 42.723,73.774 h1.52 r270